# EAGLE board magnescharger (EAGLE 9.2.1)
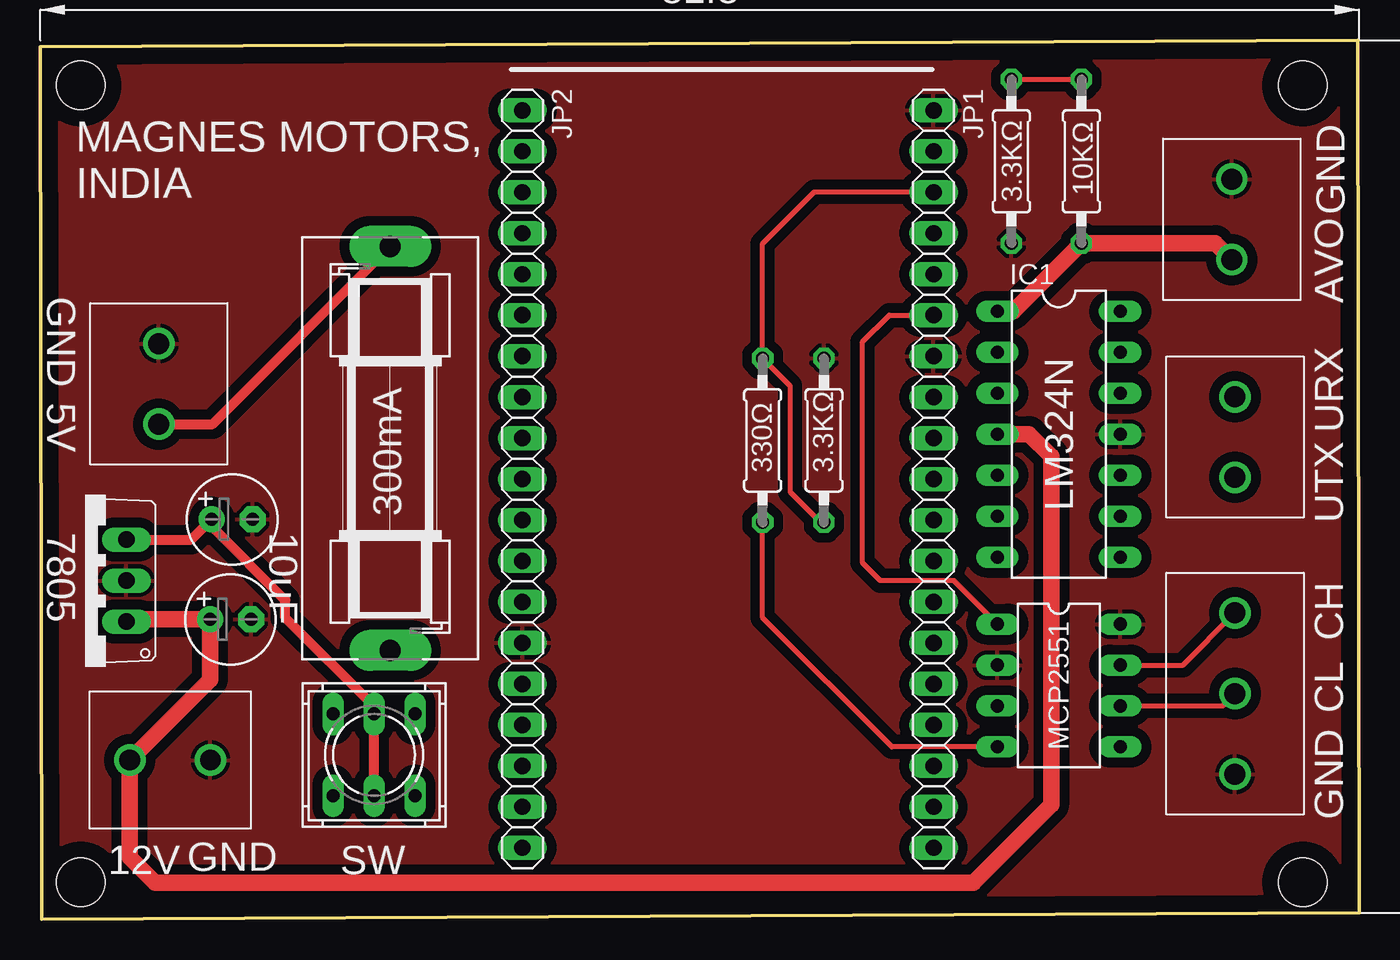
[diagram p0: board, top side]
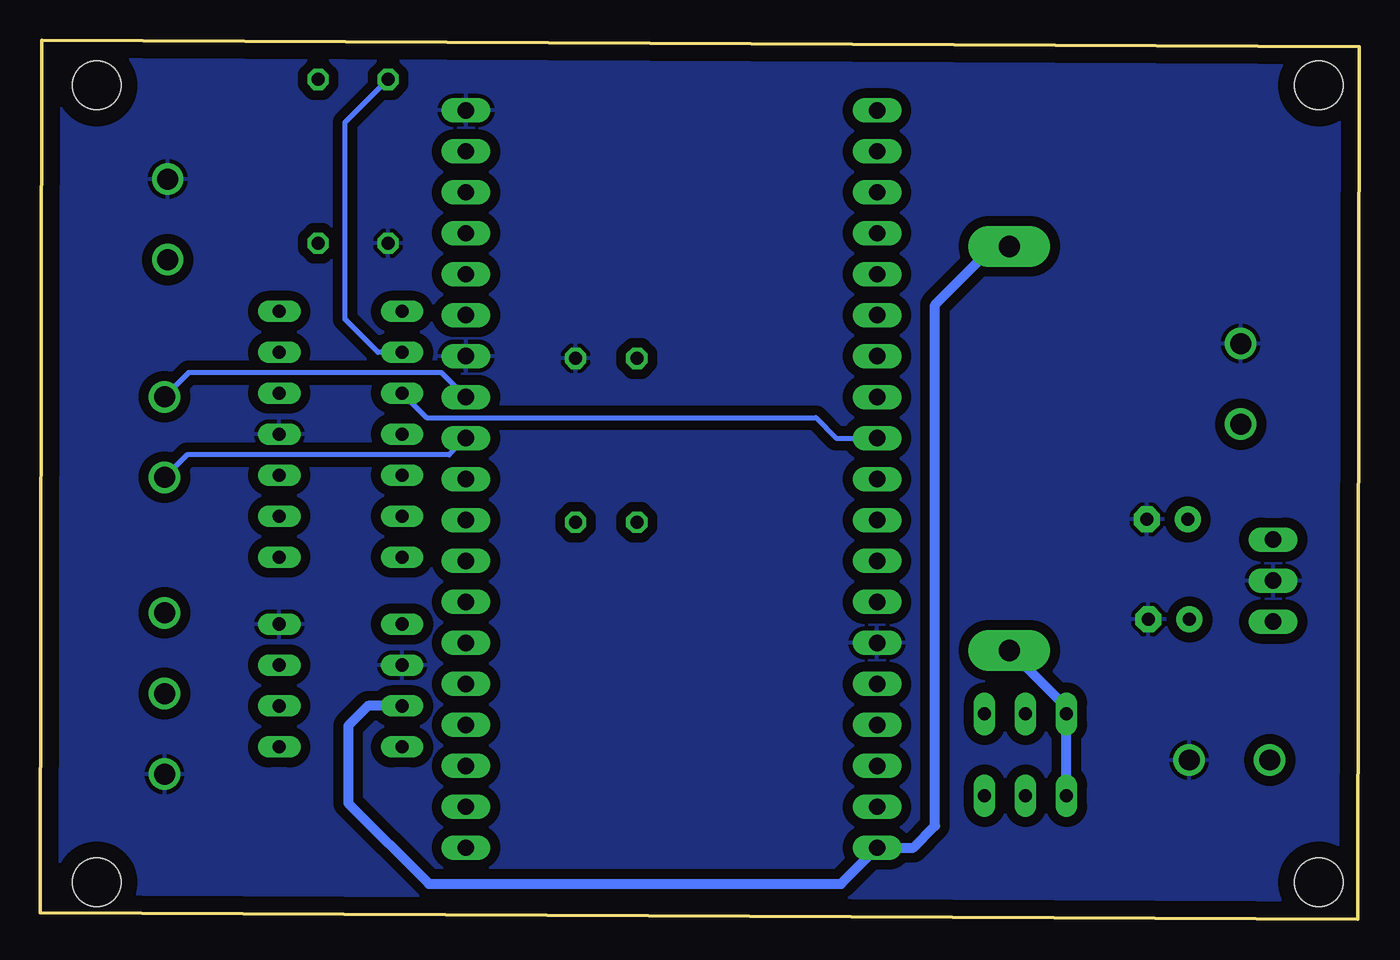
[diagram p1: board, bottom side, seen from below]

Size 81.8 x 54.5 mm. Coordinates in mm from the lower left corner, seen from the top.
Outline: 81.7,54.5 81.8,0.4 0.1,0 0,54.1 81.7,54.5
Copper layers (1*16): Top 0.035mm / dielectric 1.5mm / Bottom 0.035mm
Design rules "default": minimum track width 6mil, minimum drill 0.35mm, track to track 6mil, track to pad 6mil, pad to pad 6mil, via to via 6mil, smd to smd 6mil, copper to edge 40mil, drill to drill 6mil, minimum pad ring 10mil, minimum via ring 8mil, stop-mask expansion 4mil, vias tented up to drill 0mil, thermal gap 10mil
Net classes: 0 default: clearance 0.205 mm
Holes 3 mm at 2.5,51.7 2.5,2.3 78.3,2.3 78.3,51.7

## Footprints (pad centres in the part's own frame; a part is rotated, then mirrored left to right if it is on the bottom)
E2,5-6 = drill 0.813 pad 1.6: + -1.27,0 | drill 0.813 pad 1.6 octagon: - 1.27,0
691131710003 = drill 1.3: 1 -5,0; 2 0,0; 3 5,0
SH25 = drill 1.321 pad 2.54 long: 1 -12.522,0; 2 12.522,0
DIL14 = drill 0.813 long: 1 -7.62,-3.81; 2 -5.08,-3.81; 3 -2.54,-3.81; 4 0,-3.81; 5 2.54,-3.81; 6 5.08,-3.81; 7 7.62,-3.81; 8 7.62,3.81; 9 5.08,3.81; 10 2.54,3.81; 11 0,3.81; 12 -2.54,3.81; 13 -5.08,3.81; 14 -7.62,3.81
1X19 = drill 1.016 long: 1 -22.86,0; 2 -20.32,0; 3 -17.78,0; 4 -15.24,0; 5 -12.7,0; 6 -10.16,0; 7 -7.62,0; 8 -5.08,0; 9 -2.54,0; 10 0,0; 11 2.54,0; 12 5.08,0; 13 7.62,0; 14 10.16,0; 15 12.7,0; 16 15.24,0; 17 17.78,0; 18 20.32,0; 19 22.86,0
TO220V = drill 1.016 long: 1 -2.54,-2.54; 2 0,-2.54; 3 2.54,-2.54
9077-2 = drill 0.813 long: 1 -2.54,2.54; 2 0,2.54; 3 2.54,2.54; 4 -2.54,-2.54; 5 0,-2.54; 6 2.54,-2.54
691131710002 = drill 1.3: 1 -2.5,0; 2 2.5,0
0207/10 = drill 0.813 octagon: 1 -5.08,0; 2 5.08,0
DIL8 = drill 0.813 long: 1 -3.81,-3.81; 2 -1.27,-3.81; 3 1.27,-3.81; 4 3.81,-3.81; 5 3.81,3.81; 6 1.27,3.81; 7 -1.27,3.81; 8 -3.81,3.81

## Placement (x,y rotation side)
C1  [E2,5-6]  11.8,18.6 0 top
C2  [E2,5-6]  11.9,24.8 0 top
CANBUS  [691131710003]  74.1,14 270 top
F2  250mA  [SH25]  21.7,29.2 90 top
IC1  LM324N  [DIL14]  63.17,30.08 270 top
JP1  [1X19]  55.4,27.3 270 top
JP2  [1X19]  29.9,27.3 270 top
LM-7805  786TV  [TO220V]  2.8,21 90 top
MCU-S/W  9077-2  [9077-2]  20.7,10.2 0 top
OUTPUT  [691131710002]  73.9,43.4 270 top
POWER  [691131710002]  8.05,9.88 0 top
POWER2  [691131710002]  7.35,33.2 90 top
R1  330  [0207/10]  44.8,29.7 270 top
R2  3.3K  [0207/10]  64.57,47 270 top
R3  10K  [0207/10]  60.23,47 90 top
R4  3k3  [0207/10]  48.6,29.7 270 top
U1  MCP2551P  [DIL8]  63.17,14.5 270 top
UART  [691131710002]  74.1,29.9 90 top

## Library data of the parts
C1 C2 = rcl; SPICEPREFIX: C
CANBUS OUTPUT POWER POWER2 UART = Wurth_Elektronik_Electromechanic_Terminal_Blocks_Connectors_rev17a
F2 = fuse; MF: SCHURTER; MPN: 0031.8211; OC_FARNELL: 1162741; OC_NEWARK: 96B9380
IC1 LM-7805 = linear
JP1 JP2 = pinhead
MCU-S/W = switch-misc
R1-R4 = rcl; SPICEPREFIX: R
U1 = microchip_can

## Nets
0: JP1.14
2: JP1.15
3V3: JP2.1
4: JP1.13
5: JP1.10
5V: F2.2 JP2.19 POWER2.1 U1.3
12: JP2.13
12V: C1.+ IC1.4 LM-7805.1 POWER.1
13: JP2.15
14: JP2.12
15: JP1.16
16: JP1.12
17: JP1.11
18: JP1.9 UART.1
19: JP1.8 UART.2
21: JP1.6 U1.1
22: JP1.3 R1.1 R4.2
23: JP1.2
25: IC1.3 JP2.9
26: JP2.10
27: JP2.11
32: JP2.7
33: JP2.8
34: JP2.5
35: JP2.6
36: JP2.3
39: JP2.4
CANH: CANBUS.1 U1.7
CANL: CANBUS.2 U1.6
CLK: JP1.19
CMD: JP2.18
CRX: R1.2 U1.4
D0: JP1.18
D1: JP1.17
D2: JP2.16
D3: JP2.17
EN: JP2.2
GND: C1.- C2.- CANBUS.3 IC1.11 JP1.1 JP1.7 JP2.14 LM-7805.2 OUTPUT.1 POWER2.2 POWER.2 R3.1 R4.1 U1.2 U1.8
N$3: F2.1 MCU-S/W.1 MCU-S/W.4
N$6: IC1.2 R2.1 R3.2
RX: JP1.5
TX: JP1.4
VCCSW: C2.+ LM-7805.3 MCU-S/W.2 MCU-S/W.5
VO: IC1.1 OUTPUT.2 R2.2
VREF: U1.5

## Tracks (layer width: path | path; a pad name or v marks a point on that pad's centre or on a via)
5V
  Top 0.61: POWER2.1 10.68,30.7 F2.2
  Bottom 0.61: U1.3 61.47,13.23 62.7,12 62.7,7.2 57.7,2.2 32.14,2.2 JP2.19 27.66,4.44 26.3,5.8 26.3,38.1 22.68,41.72 F2.2
12V
  Top 1.016: IC1.4 61.32,30.08 62.7,28.7 62.7,7.1 57.87,2.27 57.5,2.27 7.13,2.27 5.55,3.85 POWER.1 10.53,14.86 C1.+ 5.48,18.6 LM-7805.1
18
  Bottom 0.305: JP1.9 56.44,28.8 72.7,28.8 UART.1
19
  Bottom 0.305: JP1.8 56.92,33.9 72.6,33.9 UART.2
21
  Top 0.305: U1.1 56.67,21 52.1,21 51,22.1 51,35.8 52.66,37.46 JP1.6
22
  Top 0.305: JP1.3 55.38,45.1 48,45.1 44.8,41.9 R1.1 46.5,33.08 46.5,26.5 48.38,24.62 R4.2
25
  Bottom 0.305: IC1.3 57.84,31.1 33.7,31.1 32.44,29.84 JP2.9
CANH
  Top 0.305: U1.7 70.87,15.77 CANBUS.1
CANL
  Top 0.305: U1.6 73.33,13.23 CANBUS.2
CRX
  Top 0.305: U1.4 52.81,10.69 44.8,18.7 R1.2
GND
  pour Top (isolate 0.61): 0,54.5 81.8,54.5 81.8,0.4 0,0.4
  pour Bottom (isolate 0.61): 0,54.5 81.8,54.5 81.8,0.4 0,0.4
N$3
  Bottom 0.61: MCU-S/W.4 MCU-S/W.1 18.16,13.14 F2.1
N$6
  Top 0.305: R3.2 R2.1
  Bottom 0.305: IC1.2 60.86,35.16 62.9,37.2 62.9,49.41 R3.2
VCCSW
  Top 0.61: LM-7805.3 9.37,23.54 C2.+ 10.63,24.37 15.2,19.8 15.2,18.7 20.7,13.2 MCU-S/W.2 MCU-S/W.5
VO
  Top 1.016: IC1.1 60.35,37.7 R2.2 72.88,41.92 OUTPUT.2

## Text on the board
tNames: MAGNES MOTORS, / INDIA | 3.3KΩ | 10KΩ | GND | AVO | GND | 5V | URX | 300mA | 330Ω | 3.3KΩ | UTX | 10uF | 7805 | CH | MCP2551 | CL | GND | 12V | GND | SW